# Altium PCB LedDimming.PcbDoc
Units mm, origin at the board's own origin, x right, y up, seen from the top; angles counter-clockwise.
Board outline 50.16 x 10.16 mm, 2 copper layers (Top Layer, Bottom Layer); 26 components, 21 nets, 67 pads, 7 vias.
Unrouted connection lines stored in the file: 8.
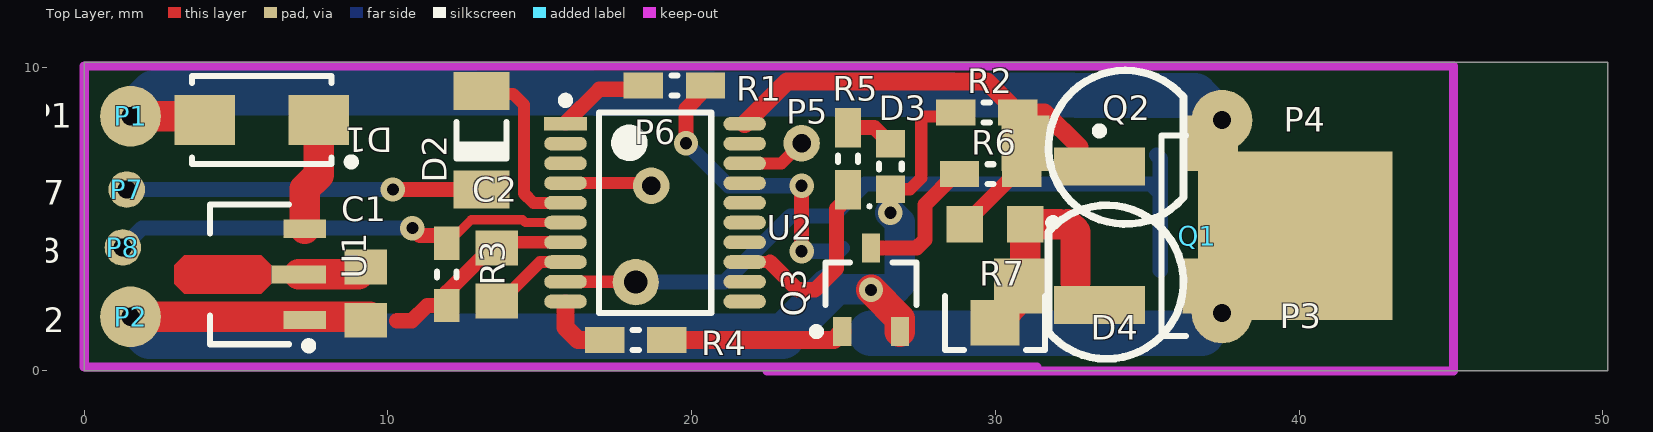
[diagram p0: Top Layer view]
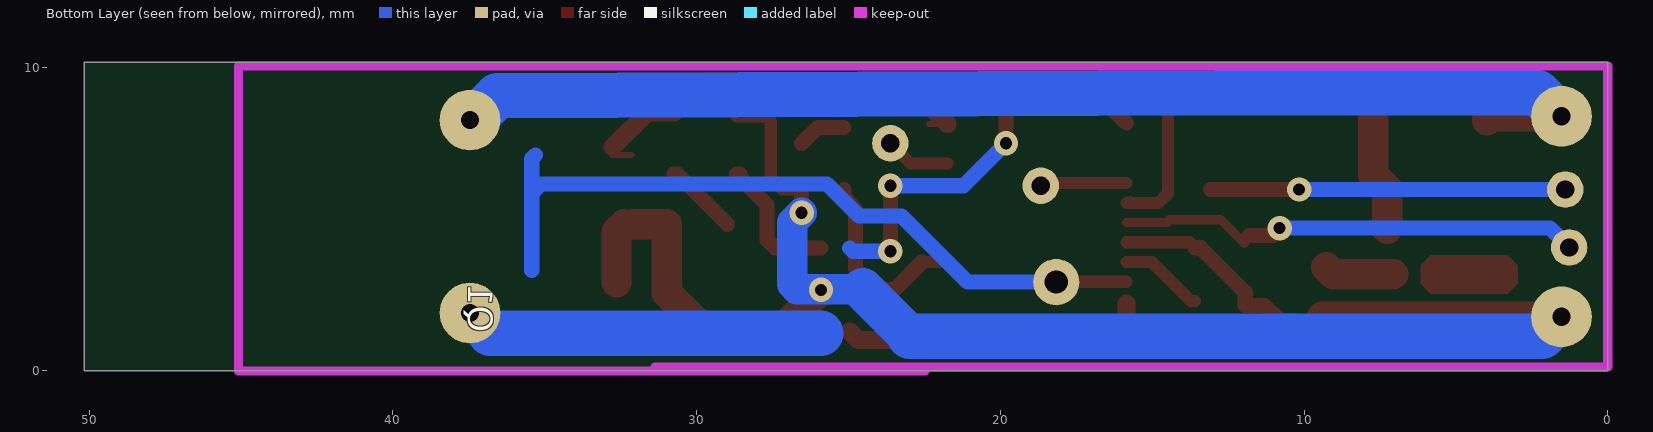
[diagram p1: Bottom Layer view, seen from below]

## Layer stack, top to bottom
Top Solder: solder mask 0.0102, Solder Resist, Dk 3.5
Top Layer: signal copper 0.0356
Dielectric 1: dielectric 0.32, FR-4, Dk 4.8
Bottom Layer: signal copper 0.0356
Bottom Solder: solder mask 0.0102, Solder Resist, Dk 3.5

## Board outline
0,0 50.165,0 50.165,10.16 0,10.16

## Design rules (kind name [scope] priority, off if disabled: settings)
Clearance [All] p1: gap=0.2 ignorepadtopadclearanceinfootprint=FALSE
PolygonConnect [All] p1: connectstyle=Relief reliefconductorwidth=0.254 reliefentries=4 polygonreliefangle="90 Angle" airgapwidth=0.254
RoomDefinition LedDimming [InComponentClass('LedDimming')] p1: confinementstyle=ConfineIn formatcopy=TRUE lockcomponents=FALSE outline -50.8,-76.2 0,-76.2 0,-50.8 -50.8,-50.8
RoutingVias [All] p1: holewidth=0.4 width=0.7 viastyle="Through Hole" minholewidth=0.3 minwidth=0.8 maxholewidth=0.5 maxwidth=0.6
SolderMaskExpansion [All] p1: expansion=0.102
Width Power [InNet('VCC_5V') Or InNet('VCC_12V')or InNet('GND') Or InNet('NetD1_1')or InNet('NetP3_1')] p1: maxlimit=2 minlimit=0.254 preferedwidth=1
Width [All] p2: maxlimit=1 minlimit=0.2 preferedwidth=0.5
30 further rules are at their usual default settings.

## Components (designator, comment, footprint, x,y, rotation, side; value= is the part's Value field where it differs from the comment)
C1 "106" CAPC2012X12N 9.271,2.54 r90 top
C2 "104" CAPC2012X12N 13.589,3.175 r270 top
D1 "1N4007" SODFL504X244-2N 5.842,8.255 r180 top
D2 "1N4148" DIOMELF3515N 13.081,7.594 r90 top
D3 "LED0603" DIOC1608X06N 26.543,6.731 r90 top
D4 "LED IR 3mm" "LED_IR_3mm-SMD- Modifire" 35.179,2.921 r180 top
P1 "P" Point#1 1.524,8.382 r0 top
P2 "P" Point#1 1.524,1.778 r0 top
P3 "P" Point#1 37.465,1.905 r0 top
P4 "P" Point#1 37.465,8.255 r0 top
P5 "P" Point#2 23.622,7.493 r0 top
P6 "P" Point#2 18.669,6.096 r0 top
P7 "P" Point#2 1.397,5.969 r0 top
P8 "P" Point#2 1.27,4.064 r0 top
Q1 "AOD424" DPAK228P991X229-3N_TO252 37.528,4.445 r0 top
Q2 "LED IR 3mm" "LED_IR_3mm-SMD- Modifire" 32.766,7.366 r0 top
Q3 "C1815" SOT95P278X125-3N 25.908,2.667 r90 top
R1 "470R" RESC2608X06N_0603#1 19.431,9.398 r0 top
R2 "10K" RESC2608X06N_0603#1 29.718,8.509 r0 top
R3 "10K" RESC2608X06N_0603#2 11.938,3.175 r90 top
R4 "1K" RESC2608X06N_0603#1 18.161,1.016 r0 top
R5 "1K" RESC2608X06N_0603#1 25.146,6.985 r270 top
R6 "100R" RESC2608X06N_0603#1 29.845,6.477 r0 top
R7 "1K" Var_SMD_3x3 29.988,1.576 r180 top
U1 "CJA1117B-5.0 SOT89" SOT89-150P409X160-3N 5.461,3.175 r180 top
U2 "STM8S003" TSOP65P640X120-20N 18.796,5.207 r0 top value=STM8S003F3

## Footprints (in the part's own frame and the unit in brackets; to place one, negate y for a bottom-side part, rotate by r counter-clockwise, add the part's x,y. Pads: shape width x height; smd on the part's side, far side on the other; paste and mask are expansions set on the pad)
CAPC2012X12N [mm] "Chip Capacitor, 2-Leads, Body 2.00x1.25mm, IPC Medium Density"
  rect 1.15x1.4 smd: 1(-0.875,0) 2(0.875,0)
  body extent -1.1,-0.67 1.1,0.67, height 1.2
DIOC1608X06N [mm] "Chip Diode, 2-Leads, Body 1.60x0.80mm, IPC Medium Density"
  rect 0.9x0.95 smd: 1(-0.75,0) 2(0.75,0)
  silkscreen extent -1.36,-0.38 0.1,0.74, body extent -0.9,-0.4 0.9,0.4, height 0.6
DIOMELF3515N [mm] "MELF Diode, 2-Leads, Body 3.50x1.55mm, IPC Medium Density"
  rect 1.25x1.85 smd: 1(-1.625,0) 2(1.625,0)
  silkscreen extent -0.6,-0.83 0.6,0.82, body extent -1.85,-0.85 1.85,0.85, height 1.69
DPAK228P991X229-3N_TO252 [mm] "D-PAK, 3-Pads, Body 6.15x6.65mm (max), IPC Medium Density"
  rect 3x1.25 smd: 1(-4.1,2.28) 3(-4.1,-2.28)
  rect 6.4x5.55 smd: 4(2.35,0)
  silkscreen extent -4.22,-3.3 -1.25,3.58, body extent -2.05,-3.3 4.05,3.3, height 2.29
"LED_IR_3mm-SMD- Modifire" [mil] "IR Transmitter and Receiver Led"
  rect 71.81x71.81 smd: 1(170,5)
  rect 62.3x71.81 smd: 2(-70,5)
  silkscreen extent -40,-100 135,100
Point#1 [mm]
  round 2 hole 0.6: 1(0,0)
Point#2 [mm]
  round 1.2 hole 0.6: 1(0,0)
RESC2608X06N_0603#1 [mm] "Chip Resistor, 2-Leads, Body 2.60x0.80mm, IPC Medium Density"
  rect 1.3x0.85 smd: 1(-1.025,0) 2(1.025,0)
  silkscreen extent -0.1,-0.33 0.1,0.33, body extent -1.3,-0.4 1.3,0.4, height 0.6
RESC2608X06N_0603#2 [mm] "Chip Resistor, 2-Leads, Body 2.60x0.80mm, IPC Medium Density"
  rect 1.1x0.85 smd: 1(-1.025,0) 2(1.025,0)
  silkscreen extent -0.1,-0.33 0.1,0.33, body extent -1.3,-0.4 1.3,0.4, height 0.6
SODFL504X244-2N [mm] "SODFL, 2-Leads, Body 2.70x5.04mm, IPC Medium Density"
  rect 2x1.65 smd: 1(-1.875,0) 2(1.875,0)
  silkscreen extent -3.08,-1.45 2.3,1.5, body extent -2.3,-1.45 2.3,1.45, height 2.44
SOT89-150P409X160-3N [mm] "SOT89, 3-Leads, Body 4.50x2.45mm, Pitch 1.50mm, Lead Span 4.1mm, IPC Medium Density"
  rect 1.4x0.6 smd: 1(-1.8,1.5) 3(-1.8,-1.5)
  rect 1.8x0.6 smd: 2(-1.6,0)
  Top Layer region: -0.7,0.3 -0.365,0.635 2.165,0.635 2.5,0.3 2.5,-0.3 2.165,-0.635 -0.365,-0.635 -0.7,-0.3
  silkscreen extent -2.05,-2.3 1.32,2.47, body extent -1.28,-2.3 1.32,2.3, height 1.6
SOT95P278X125-3N [mm] "SOT23, 3-Leads, Body 2.92x2.78mm, Pitch 0.95mm, IPC Medium Density"
  rect 0.95x0.6 smd: 1(-1.375,0.95) 2(-1.375,-0.95) 3(1.375,0)
  silkscreen extent -1.5,-1.5 0.9,1.92, body extent -0.9,-1.52 0.9,1.52, height 1.25
TSOP65P640X120-20N [mm] "TSOP, 20-Leads, Body 6.50x4.40mm, Pitch 0.65mm, IPC Medium Density"
  rect 1.4x0.45 smd: 1(-2.95,2.925)
  oval 1.4x0.45 smd: 2(-2.95,2.275) 3(-2.95,1.625) 4(-2.95,0.975) 5(-2.95,0.325) 6(-2.95,-0.325) 7(-2.95,-0.975) 8(-2.95,-1.625) 9(-2.95,-2.275) 10(-2.95,-2.925) 11(2.95,-2.925) 12(2.95,-2.275) 13(2.95,-1.625) 14(2.95,-0.975) 15(2.95,-0.325) 16(2.95,0.325) 17(2.95,0.975) 18(2.95,1.625) 19(2.95,2.275) 20(2.95,2.925)
  silkscreen extent -3.07,-3.3 1.85,3.82, body extent -3.2,-3.3 3.2,3.3, height 1.2
Var_SMD_3x3 [mm] "3x3 102-1K SMD 3303W"
  rect 1.2x1.2 smd: 1(-1,-3.25) 3(1,-3.25)
  rect 1.6x1.5 smd: 2(0,0)
  silkscreen extent -2.03,-3.43 1.65,0.89

## Part data
C1: library part "Capacitor 106"
C2: library part "Capacitor 104 0603"
D1: library part "1N4007_SMD Diode", "1N4007_SMD"
D2: library part 1N4148_SMD, "DIODE GEN PURP 75V 200MA DO213AA", Supplier Part Number 1=1N4148UR-1-ND, Supplier 1=Digi-Key
P1 P2 P3 P4 P5 P6 P7 P8: library part Point
Q1: library part "AOD424 20V N-Channel MOSFET", "AOD424 20V N-Channel MOSFET"
Q3: library part "Transitor C1815 NPN", "SOT-23 Plastic-Encapsulate Transistors"
R1: library part R470_0603_5%, "Thick Film Resistors - SMD 470 ohm 5%", Supplier Part Number 1=CR0603-JW-471ELFCT-ND, Supplier 1=Digi-Key
R2 R3: library part R10k_0603_5%, "RES SMD 10K OHM 1% 1/4W 0603", Supplier Part Number 1=541-10.0KSCT-ND, Supplier 1=Digi-Key
R4 R5: library part 1k_0603_5%, "Thick Film Resistors - SMD 0603 1kOHMS 5% 1/10WATT", Supplier Part Number 1=CR0603-JW-101ELFCT-ND, Supplier 1=Digi-Key
R6: library part R100_0603_5%, "Thick Film Resistors - SMD 0603 100OHMS 5% 1/10WATT", Supplier Part Number 1=CR0603-JW-101ELFCT-ND, Supplier 1=Digi-Key
R7: library part "Varistor 3x3 SMD 1KOhm", "Varistor 3x3 SMD 1KOhm 5% 1/10WATT", Supplier Part Number 1=CR0603-JW-101ELFCT-ND, Supplier 1=Digi-Key
U1: "CJA1117B-5.0 SOT89 Power IC 1A 5V_IC"
U2: "MCU 8-bit STM8S STM8 CISC 8KB Flash 3.3V/5V 20-Pin TSSOP T/R", Supplier Part Number 1=497-18051-1-ND

## Free pads (board coordinates)
  round 1.524 hole 0.762: 2(18.161,2.921)

## Via types
v1: diameter 0.8, hole 0.4, Top Layer to Bottom Layer, 7 vias

## Nets (pads, with @x,y where several pads share a name; then routed paths per layer and width w, separated by ;. In a path a pad name is that pad's centre, name@x,y a point inside that pad or via, vN(x,y) a via of type N, cw(c..) or ccw(c..) an arc to the next point about the centre after c; other vN are vias at no path point)
D_Input: P8.1 R3.2 U2.6 | length 15.4
  Top Layer w0.2: v1(10.804,4.699) v1@11.049,4.454
  Top Layer w0.3: R3.2@11.811,4.454 11.96,4.214 11.969,4.2 12.744,4.975 14.434,4.975 14.527,4.882 U2.6
  Top Layer w0.5: v1@11.049,4.454 R3.2@11.811,4.454
  Bottom Layer w0.5: P8.1 1.905,4.699 v1(10.804,4.699)
D_Output: D2.1 P7.1 | length 11.7
  Top Layer w0.5: v1(10.16,5.969) D2.1
  Bottom Layer w0.5: P7.1 v1(10.16,5.969)
GND: C1.1 C2.1 D3.1 P2.1 Q1.3 Q3.2 R2.1 R3.1 U1.1 U2.7 | length 50.5
  Top Layer w0.4: C2.1 13.771,4.232 U2.7 ; D3.1 27.19,5.981 27.559,6.35 27.559,8.237 27.695,8.373 28.693,8.373 R2.1
  Top Layer w0.5: 10.287,1.651 10.795,1.651 11.294,2.15 R3.1 11.938,2.589 13.399,4.05 C2.1 ; v1(26.543,5.207) D3.1
  Top Layer w1: P2.1 C1.1@9.398,1.778 ; v1(25.908,2.667) 26.858,1.717 Q3.2
  Bottom Layer w1: 24.536,2.692 26.695,2.692 26.858,2.855 26.858,4.892 v1(26.543,5.207)
  Bottom Layer w1.4: 22.987,1.143 24.536,2.692
  Bottom Layer w1.5: P2.1 2.159,1.143 22.987,1.143
NetC2_2: C2.2 U2.8 | length 2.8
  Top Layer w0.4: C2.2 13.73,2.3 15.012,3.582 U2.8
NetD1_1: D1.1 U1.3 | length 3.8
  Top Layer w1: U1.3 7.261,5.991 7.717,6.447 D1.1
NetD2_2: D2.2 U2.5 | length 6.1
  Top Layer w0.2: U2.5@15.721,5.657 U2.5
  Top Layer w0.4: D2.2@13.081,9.118 14.123,9.118 14.478,8.763 14.478,5.842 14.788,5.532 U2.5
NetD3_2: D3.2 R5.1 | length 1.6
  Top Layer w0.5: R5.1 26.014,8.01 D3.2
NetD4_1: D4.1 R7.1 R7.2 | length 7.1
  Top Layer w0.4: 32.131,4.826 32.385,4.826
  Top Layer w1: R7.2 30.988,2.576 R7.1 32.131,4.826 ; 32.385,4.826 32.639,4.572 32.639,2.921
NetP3_1: P3.1 Q1.4 | length 11.8
  Bottom Layer w1.2: P3.1@36.802,1.242 P3.1
  Bottom Layer w1.5: 25.908,1.242 P3.1@36.802,1.242
NetQ1_1: Q1.1 R1.1 | length 10.3
  Top Layer w0.2: v1(19.812,7.493) v1@19.939,7.493
  Top Layer w0.5: v1(19.812,7.493) 19.812,8.627 20.456,9.271 ; v1(23.622,3.937) v1(23.622,6.096)
  Bottom Layer w0.2: v1@23.495,6.223 v1(23.622,6.096)
  Bottom Layer w0.5: v1(19.812,7.493) 21.209,6.096 v1(23.622,6.096) ; v1(23.622,3.937) 24.853,3.937 24.958,4.042
NetQ2_2: Q2.2 R2.2 U2.20 | length 13.7
  Top Layer w0.2: U2.20 U2.20@22.356,8.132 ; 32.14,7.112 32.766,7.112
  Top Layer w0.6: U2.20 23.139,9.525 29.727,9.525 R2.2 31.623,8.509 32.766,7.366
NetQ3_1: Q3.1 R4.2 | length 5.9
  Top Layer w0.6: R4.2 24.682,1.016 Q3.1
NetQ3_3: Q3.3 R6.1 | length 4.6
  Top Layer w0.5: Q3.3 27.41,4.042 27.686,4.318 27.686,5.47 28.693,6.477 R6.1@28.575,6.477
NetR1_2: R1.2 U2.1 | length 3
  Top Layer w0.5: U2.1@15.846,8.157 16.96,9.271 18.406,9.271
NetR4_1: R4.1 U2.10 | length 2.2
  Top Layer w0.6: U2.10@15.846,2.207 15.846,1.426 16.256,1.016 R4.1
NetR5_2: R5.2 U2.13 | length 6.6
  Top Layer w0.2: R5.2@25.019,5.833 R5.2
  Top Layer w0.4: U2.13 22.58,3.582
  Top Layer w0.5: 22.58,3.582 23.495,2.667 24.066,2.667 24.765,3.365 24.765,5.334 25.146,5.715 R5.2
NetR6_2: R6.2 R7.3 | length 2.5
  Top Layer w0.2: R7.3 R7.3@28.988,4.849
  Top Layer w0.5: R7.3 30.639,6.477 R6.2@30.743,6.477
RESET: P6.1 U2.4 | length 2.9
  Top Layer w0.4: U2.4 P6.1@18.583,6.182
  Top Layer w0.5: P6.1@18.583,6.182 P6.1
SWIM: P5.1 U2.18 | length 2.1
  Top Layer w0.4: U2.18 22.961,6.832 P5.1
VCC_5V: C1.2 D4.2 pad.2 Q2.1 U1.2 U2.9 | length 27.2
  Top Layer w0.4: U2.9 18.15,2.932 pad.2
  Top Layer w1: U1.2 9.031,3.175 C1.2
  Bottom Layer w0.5: pad.2 21.082,2.921 23.255,5.094 24.652,5.094 25.712,6.154 26.147,6.154 26.149,6.157 26.937,6.157 26.939,6.154 35.121,6.154 35.433,5.842 ; 35.306,7.112 35.433,6.985 35.433,5.842 ; 35.433,3.302 35.433,5.842
VCC_12V: D1.2 P1.1 P4.1 | length 39.1
  Top Layer w1: P1.1 3.84,8.382 D1.2
  Bottom Layer w1.5: P1.1 2.302,9.16 10.684,9.16 12.828,9.152 36.56,9.06 37.365,8.255 P4.1
pads on no net: U2.2 U2.3 U2.11 U2.12 U2.14 U2.15 U2.16 U2.17 U2.19

## Keep-outs
Keep-Out Layer:
  lines w0.3: 22.479,0 45.085,0 45.085,10.033 0,10.033 0,0.127 16.383,0.127 31.369,0.127

## Silkscreen, mask and mechanical layers (free items; w line width, h text height)
Bottom Solder:
  lines w1.2: 10.287,1.651 10.541,1.651 11.049,1.143 22.352,1.143 23.114,1.143 24.638,2.667 26.543,2.667 26.797,2.921 26.797,3.937 ; 10.287,8.636 10.795,8.636 11.303,9.144 36.195,9.144 37.084,8.255 ; 26.162,1.27 36.957,1.27

## Dimensions
0,0.127 to 0,10.033 on Mechanical 1